# Altium PCB Power_output.PcbDoc
Units mil, origin at the board's own origin, x right, y up, seen from the top; angles counter-clockwise.
Board outline 1378.05 x 1378.81 mil, 2 copper layers (Top Layer, Bottom Layer); 46 components, 17 nets, 106 pads, 251 vias.
Unrouted connection lines stored in the file: 33.
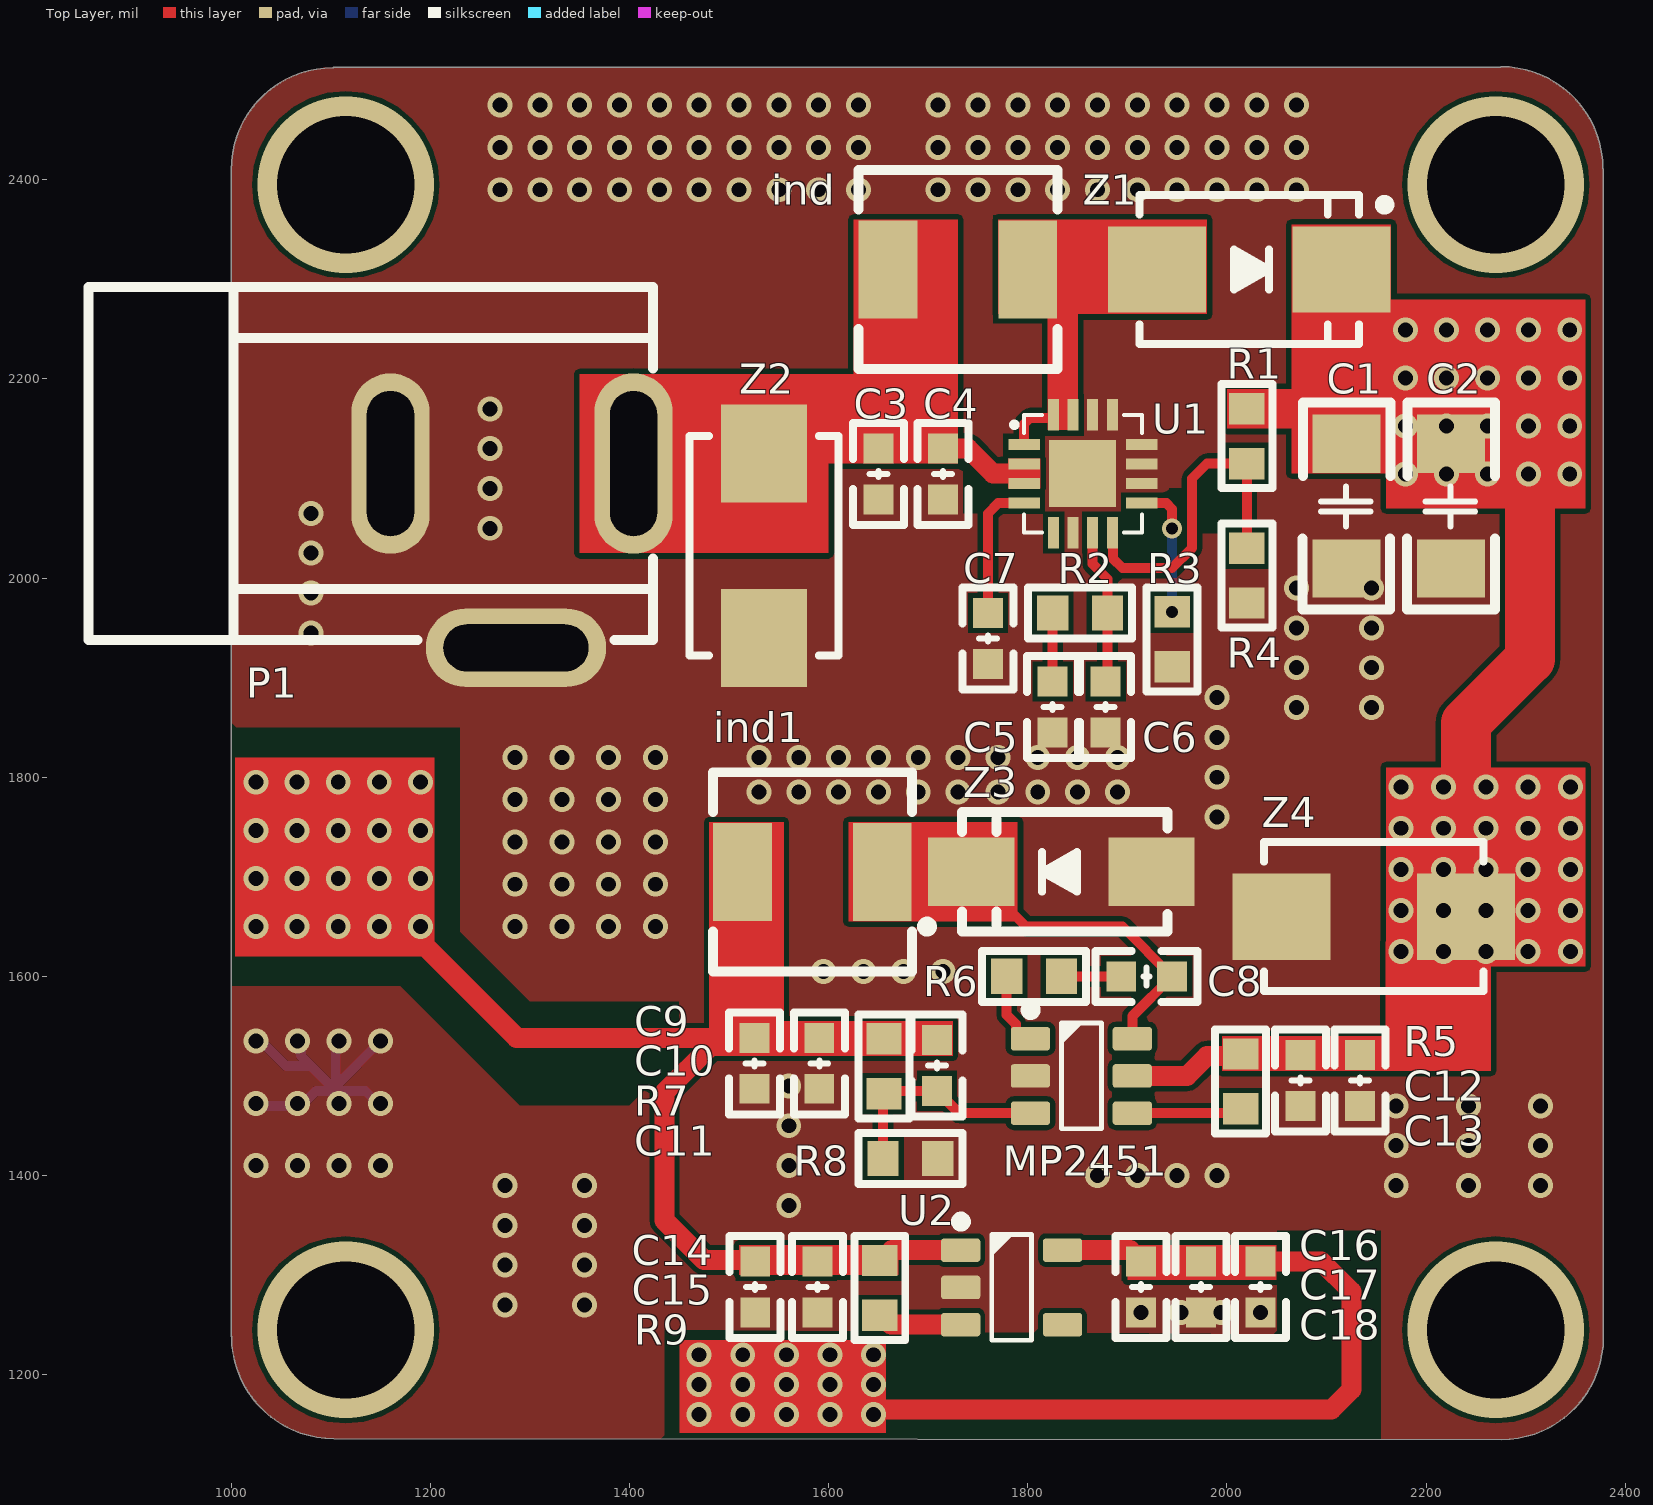
[diagram p0: Top Layer view]
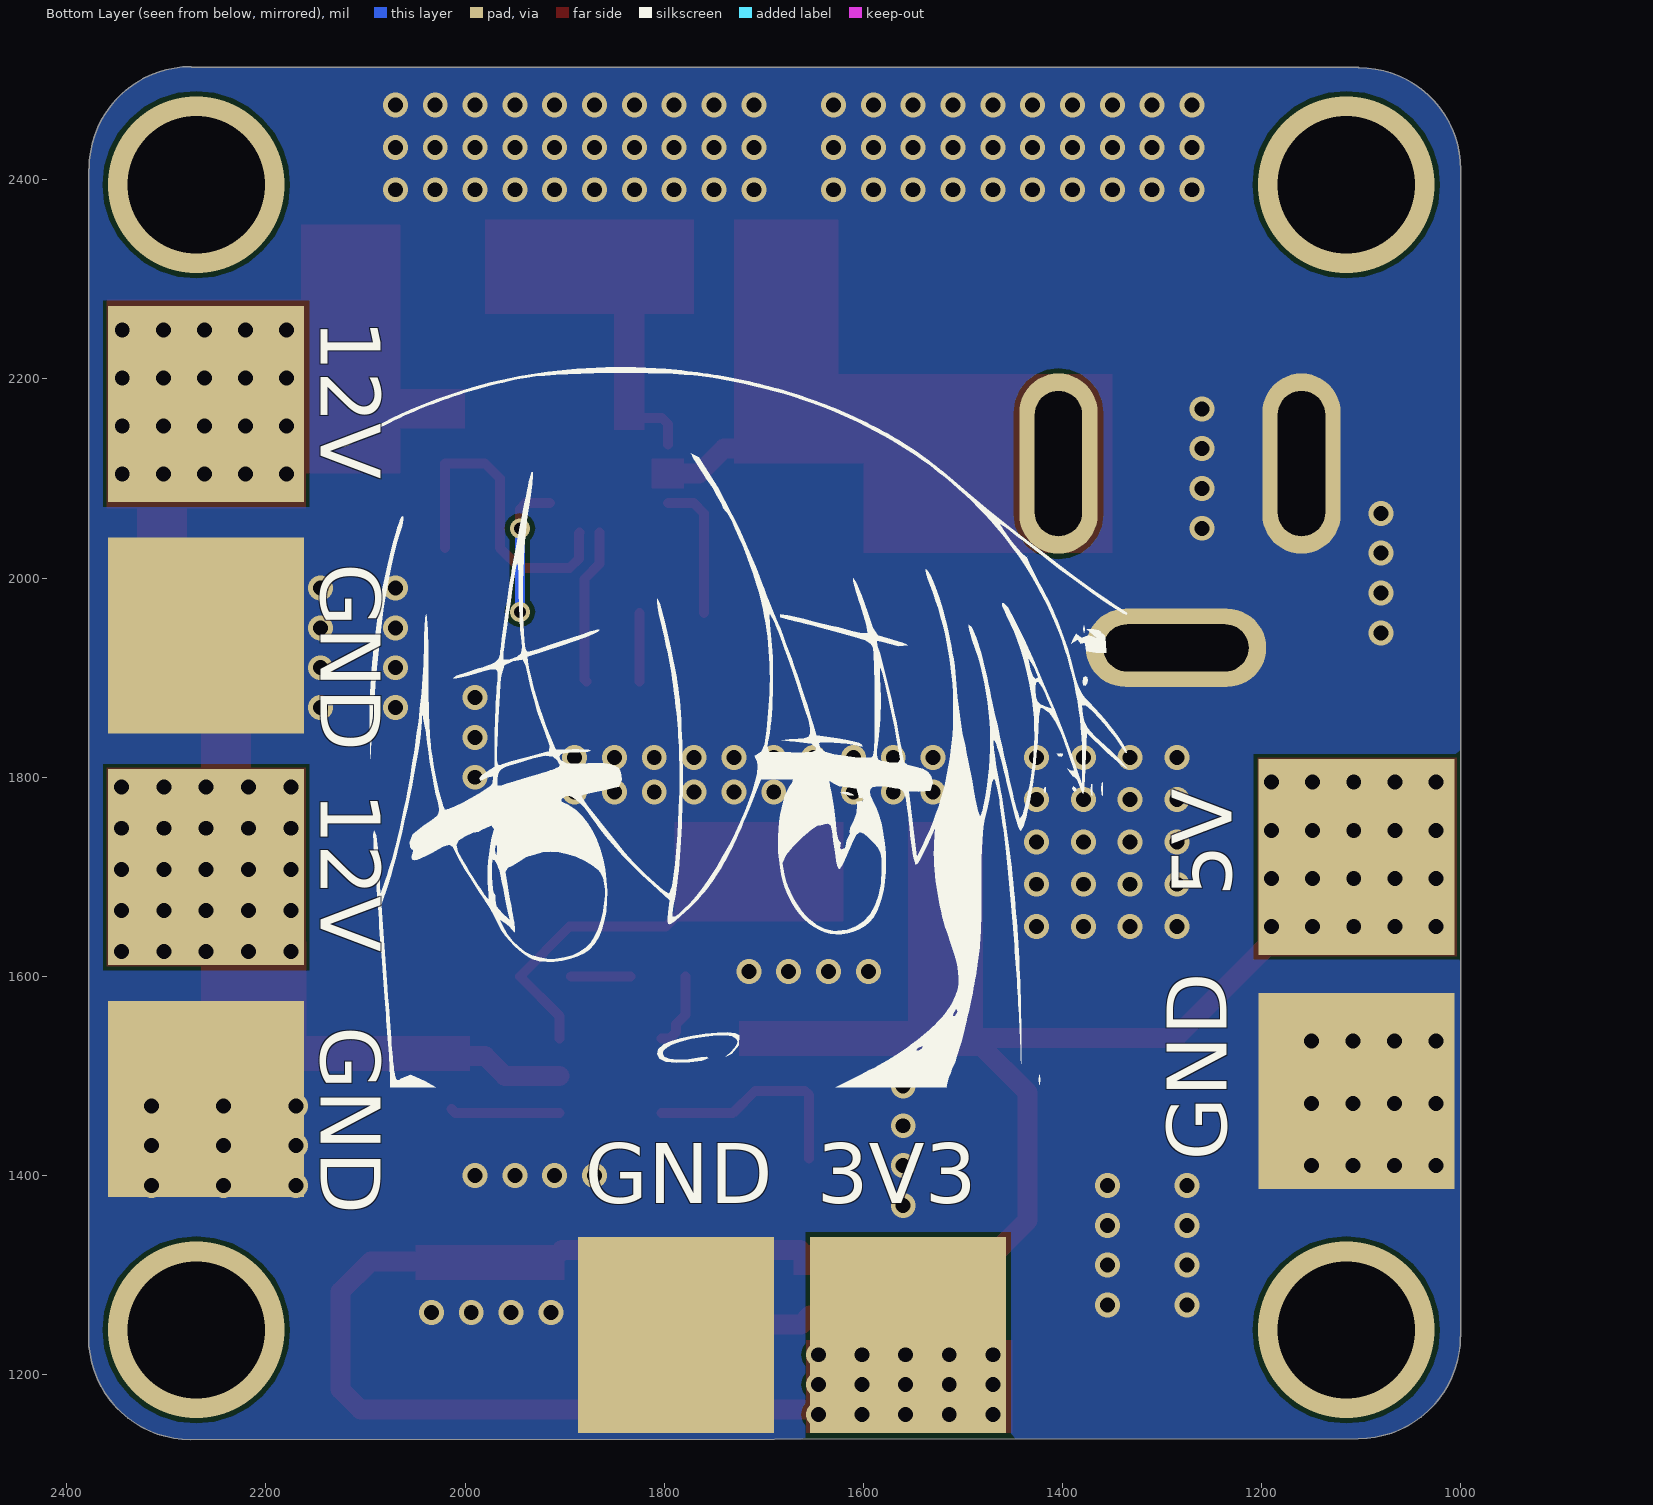
[diagram p1: Bottom Layer view, seen from below]
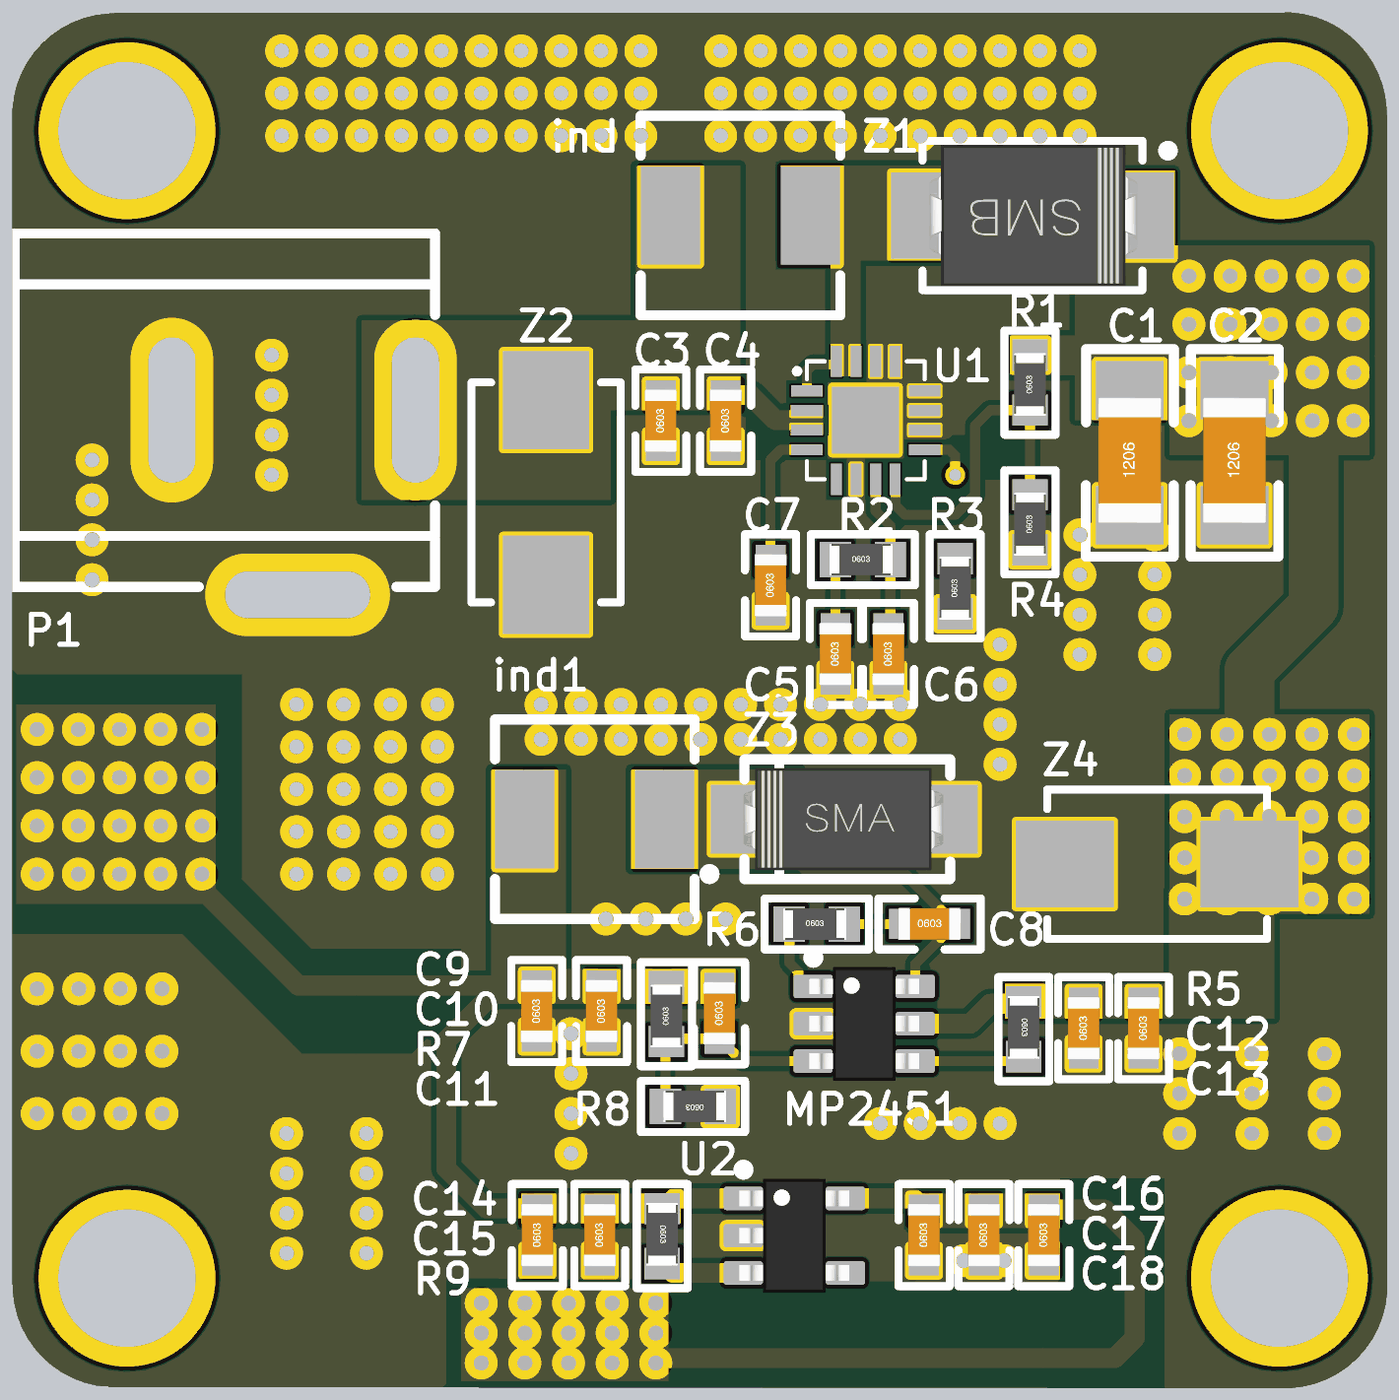
[diagram p2: 3D render of the assembled board from above, using the file's embedded part models]

## Layer stack, top to bottom
Top Solder: solder mask 0.4, Solder Resist, Dk 3.5
Top Layer: signal copper 1.4
Dielectric 1: dielectric 12.6, FR-4, Dk 4.8
Bottom Layer: signal copper 1.4
Bottom Solder: solder mask 0.4, Solder Resist, Dk 3.5

## Board outline
1102.9,1135.84 cw(c1102.9,1238.3) 1000.43,1238.3 1000,1238.3 1000,2410 1000,2410.06 cw(c1102.46,2410.06) 1102.46,2512.52 1102.95,2512.95 2275.09,2512.95 2275.09,2513.63 cw(c2275.09,2411.17) 2377.56,2411.17 2377.95,2411.17 2377.95,1237.28 2378.05,1237.28 cw(c2275.59,1237.28) 2275.59,1134.82

## Design rules (kind name [scope] priority, off if disabled: settings)
Clearance [All] p1: gap=5 ignorepadtopadclearanceinfootprint=TRUE
HoleSize [All] p1: absolutevalues=TRUE maxlimit=500 minlimit=1 maxpercent=80.000 minpercent=20.000
MinimumSolderMaskSliver [All] p1 off: minsoldermaskwidth=10
PlaneConnect [All] p1: planeconnectstyle=Direct reliefexpansion=20 reliefentries=4 reliefconductorwidth=10 reliefairgap=10
PolygonConnect [All] p1: connectstyle=Direct reliefconductorwidth=10 reliefentries=4 polygonreliefangle="90 Angle" airgapwidth=10
RoutingVias [All] p1: holewidth=12 width=20 viastyle="Through Hole" minholewidth=12 minwidth=20 maxholewidth=1000 maxwidth=1000
SilkToSilkClearance [All] p1 off: silktosilkclearance=10
SilkToSolderMaskClearance [IsPad] p1 off: minsilkscreentomaskgap=10 clearancetoexposedcopper=TRUE
SolderMaskExpansion [All] p1: expansion=4 istentingtop=FALSE
Width [All] p1: maxlimit=200 minlimit=6 preferedwidth=10
25 further rules are at their usual default settings.

## Classes and differential pairs
component class Power_output: 3V3 5V 12V C1 C2 C3 C4 C5 C6 C7 C8 C9 C10 C11 C12 C13 C14 C15 C16 C17 C18 GND ind ind1 MP2451 P1 R1 R2 R3 R4 R5 R6 R7 R8 R9 U1 U2 Z1 Z2 Z3 Z4

## Components (designator, comment, footprint, x,y, rotation, side; value= is the part's Value field where it differs from the comment)
1 "1" 1 540,1700 r0 top
3V3 "SMD-TOP" SMD-TOP 1555,1240 r180 bottom (schematic designator P3)
5V "SMD-TOP" SMD-TOP 1105,1720 r270 bottom (schematic designator P6)
12V "SMD-TOP" SMD-TOP 2260,1709.67 r180 bottom (schematic designator P8)
12V "SMD-TOP" SMD-TOP 2260,2175 r90 bottom (schematic designator P2)
C1 "?uF" CAP_1206 2120,2009.57 r90 top value=47uF/1206
C2 "?uF" CAP_1206 2225,2009.57 r90 top value=1uF/1206
C3 "?uF" CAP_0603 1650,2078.82 r90 top value=10uF/0603
C4 "?uF" CAP_0603 1715,2078.82 r90 top value=0.1uF/0603
C5 "?uF" CAP_0603 1825,1845 r90 top value=0.1uF/0603
C6 "?uF" CAP_0603 1878.19,1845 r90 top value=2nF/0603
C7 "?uF" CAP_0603 1760,1913.82 r90 top value=22nF/0603
C8 "?uF" CAP_0603 1893.82,1600 r0 top value=0.1uF/0603
C9 "?uF" CAP_0603 1525.63,1487.08 r90 top value=10uF/0603
C10 "?uF" CAP_0603 1590.63,1487.08 r90 top value=0.1uF/0603
C11 "?uF" CAP_0603 1708.82,1485 r90 top value=0.1uF/0603
C12 "?uF" CAP_0603 2073.82,1470 r90 top value=4.7uF/0603
C13 "?uF" CAP_0603 2133.82,1470 r90 top value=0.1uF/0603
C14 "?uF" CAP_0603 1526.26,1262.6 r90 top value=4.7uF/0603
C15 "?uF" CAP_0603 1588.82,1262.6 r90 top value=0.1uF/0603
C16 "?uF" CAP_0603 1913.82,1262.6 r90 top value=4.7uF/0603
C17 "?uF" CAP_0603 1973.82,1262.6 r90 top value=4.7uF/0603
C18 "?uF" CAP_0603 2033.82,1262.6 r90 top value=0.1uF/0603
GND "SMD-TOP" SMD-TOP 2260,1477 r180 bottom (schematic designator P9)
GND "SMD-TOP" SMD-TOP 1105,1485 r270 bottom (schematic designator P7)
GND "SMD-TOP" SMD-TOP 2260,1942.33 r90 bottom (schematic designator P5)
GND "SMD-TOP" SMD-TOP 1788,1240 r180 bottom (schematic designator P4)
ind "6.8uH" IND4*4*2 1659.8,2310 r0 top
ind1 "4.7uH" IND4*4*2 1653.82,1705 r180 top
MP2451 "MP2451" SOT23-6 1853.82,1500 r0 top
P1 "DC-005-5.5-2.1" DC-005 1404.08,2114.99 r0 top
R1 "?K" RES_0603 2020,2115 r90 top value=86.6K/0603
R2 "?K" RES_0603 1825,1965 r0 top value=825R/0603
R3 "?K" RES_0603 1945,1910.9 r90 top value=60.4K/0603
R4 "?K" RES_0603 2020,1975 r90 top value=10K/0603
R5 "?K" RES_0603 2013.82,1522.09 r270 top value=10K/0603
R6 "?K" RES_0603 1778.82,1600 r0 top value=10R/0603
R7 "?K" RES_0603 1655.63,1482.08 r90 top value=124K/0603
R8 "?K" RES_0603 1709.72,1417.08 r180 top value=23.7K/0603
R9 "?K" RES_0603 1651.38,1314.69 r270 top value=10K/0603
U1 "TPS55340RTER" WQFN16 1796.32,2134.29 r270 top
U2 "SPX5205M5-3.3V" SOT23-5 1783.82,1287.6 r0 top
Z1 "SS34/SMBJ" SMB 2012.48,2315 r0 top
Z2 "SMBJ-CA" "SMB( No proporcionado)" 1535,1939.96 r90 top
Z3 "SS34/SMAJ" SMA 1838.82,1705 r180 top
Z4 "SMBJ-CA" "SMB( No proporcionado)" 2054.96,1660 r0 top

## Footprints (in the part's own frame and the unit in brackets; to place one, negate y for a bottom-side part, rotate by r counter-clockwise, add the part's x,y. Pads: shape width x height; smd on the part's side, far side on the other; paste and mask are expansions set on the pad)
1 [mil]
CAP_0603 [mil] "Chip Capacitor, Body 1.6x0.8mm, 0603, IPC Medium Density"
  rect 30x30 smd: 1(0,0) 2(51.18,0)
  silkscreen extent -26,-26 77,26, body extent -6,-16 57,16, height 32
CAP_1206 [mm] "Chip Capacitor, Body 3.2x1.6mm, 1206, IPC Medium Density"
  rect 1.485x1.728 smd: 1(0,0) 2(3.186,0)
  silkscreen extent -1.05,-1.12 4.23,1.12, body extent -0.2,-0.81 3,0.81, height 1.21
DC-005 [mm]
  oval 2x4.6 hole 1.2 slot 3.7 at 90 deg mask+0.051: 1(0,0) 2(-6.2,0)
  oval 4.6x2 hole 1.2 slot 3.7 at 0 deg mask+0.051: 3(-3,-4.7)
  silkscreen extent -13.9,-4.5 0.5,4.5
IND4*4*2 [mil]
  rect 59.1x98.4 smd: 1(0,0) 2(140.2,0)
  silkscreen extent -30,-100 170,100
RES_0603 [mm]
  rect 0.8x0.9 smd: 1(0,0) 2(1.4,0)
  silkscreen extent -0.63,-0.65 2.02,0.65, body extent -0.15,-0.4 1.45,0.4, height 0.4
SMA [mm]
  rect 2.2x1.75 smd: 1(-2.173,0) 2(2.427,0)
  silkscreen extent -2.57,-1.52 3.68,1.52, body extent -2.39,-1.3 2.7,1.3, height 2.15
SMB [mm]
  rect 2.5x2.2 smd: 1(-2.096,-0.127) 2(2.604,-0.127)
  silkscreen extent -2.55,-2.03 3.83,1.77, body extent -2.37,-1.93 2.93,1.67, height 2.35
"SMB( No proporcionado)" [mm]
  rect 2.5x2.2 smd: 1(0,0) 2(4.7,0)
  silkscreen extent -0.45,-1.9 5.15,1.9, body extent -0.44,-1.97 5.14,1.97, height 1.3
SMD-TOP [mm]
  rect 5x5 smd: 1(0,0)
SOT23-5 [mm]
  rrect25% 1x0.6 smd: 1(-1.3,0.95) 2(-1.3,0) 3(-1.3,-0.95) 4(1.3,-0.95) 5(1.3,0.95)
  silkscreen extent -1.42,-1.35 0.51,1.81, body extent -1.4,-1.45 1.4,1.45, height 1.44
SOT23-6 [mm]
  round 0.5 on Mech14: 0(0,0)
  rrect25% 1x0.6 smd: 1(-1.3,0.95) 2(-1.3,0) 3(-1.3,-0.95) 4(1.3,-0.95) 5(1.3,0) 6(1.3,0.95)
  silkscreen extent -1.42,-1.35 0.51,1.81, body extent -1.4,-1.45 1.4,1.45, height 1.44
WQFN16 [mil]
  rect 11x31.5 smd mask+2: 1(0,0) 2(19.7,0) 3(39.3,0) 4(59,0) 9(59,118.2) 10(39.3,118.2) 11(19.7,118.2) 12(0,118.2)
  rect 31.5x11 smd mask+2: 5(88.6,29.6) 6(88.6,49.3) 7(88.6,68.9) 8(88.6,88.6) 13(-29.6,88.6) 14(-29.6,68.9) 15(-29.6,49.3) 16(-29.6,29.6)
  rect 67x67 smd: 17(29.33,58.68)
  silkscreen extent -30,-10 89,118

## Part data
C1 C2: library part Cap_1206, "Capacitor"
C3 C4 C5 C6 C7 C8 C9 C10 C11 C12 C13 C14 C15 C16 C17 C18: library part Cap_0603, "Capacitor"
ind ind1: library part Ind
MP2451: "降压转换器"
R1 R2 R3 R4 R5 R6 R7 R8 R9: library part Res_0603, "Resistor"
U2: "LDO IC"
Z1: library part SMBJ, "TVS", SMB=SS?
Z2 Z4: "TVS"
Z3: library part SMAJ, "TVS", SMA=D?

## Via types
v1: diameter 25, hole 15, Top Layer to Bottom Layer, 245 vias
v2: diameter 177.17, hole 137.8, Top Layer to Bottom Layer, 4 vias
v3: diameter 20, hole 12, Top Layer to Bottom Layer, 2 vias

## Nets (pads, with @x,y where several pads share a name; then routed paths per layer and width w, separated by ;. In a path a pad name is that pad's centre, name@x,y a point inside that pad or via, vN(x,y) a via of type N, cw(c..) or ccw(c..) an arc to the next point about the centre after c; other vN are vias at no path point)
3V3: 3V3.1 C16.2 C17.2 C18.2 U2.5 | length 867.3
  Top Layer w20: v1@1560,1185 1580,1165 2105,1165 2125,1185 2125,1283.52 2094.74,1313.78 C18.2 ; U2.5 1902.6,1325 C16.2
  other v1: 1470,1160 1513.75,1160 1557.5,1160 1601.25,1160 1645,1160 1470,1190 1513.75,1190 1557.5,1190 1601.25,1190 1645,1190 1470,1220 1513.75,1220 1557.5,1220 1601.25,1220 1645,1220
5V: 5V.1 C9.2 C10.2 C11.2 C14.2 C15.2 ind1.2 R7.2 R9.1 U2.1 | length 1010.1
  Top Layer w20: 1100,1725 1286.74,1538.26 1481.74,1538.26 ; 1517.5,1637.5 1517.5,1565.76 1490,1538.26 ; C9.2 1498.26,1538.26 1490,1538.26 ; C14.2 1525.04,1315 1475,1315 1435,1355 1435,1483.26 1481.74,1530 1490,1530 1490,1538.26 ; R9.1 1653.35,1314.69 1663.66,1325 U2.1
  other v1: 1025,1650 1066.25,1650 1107.5,1650 1148.75,1650 1190,1650 1025,1698.33 1066.25,1698.33 1107.5,1698.33 1148.75,1698.33 1190,1698.33 1025,1746.67 1066.25,1746.67 1107.5,1746.67 1148.75,1746.67 1190,1746.67 1025,1795 1066.25,1795 1107.5,1795 1148.75,1795 1190,1795
12V: 12V.1 C1.2 C2.2 C12.2 C13.2 MP2451.5 R1.2 R5.1 Z1.2 Z4.2 | length 2863.3
  Top Layer w10: v1(2179.29,2104.34) 2179.29,2120.71 2165,2135 2179.29,2149.29 v1(2179.29,2152.68) ; v1(2179.29,2201.01) 2205.3,2175 ; v1(2179.29,2249.34) v1@2217.36,2211.28 ; 2220.54,2175 2246.55,2175 ; v1(2220.54,2201.01) 2246.55,2175 ; v1(2220.54,2249.34) 2220.54,2214.46 2256.82,2178.18 ; 2253.64,2175 2246.55,2175 ; v1(2261.79,2104.34) 2261.79,2124.34 v1(2261.79,2152.68) 2261.79,2173.21 2260,2175 ; v1(2261.79,2201.01) v1@2260,2199.22 ; v1(2261.79,2249.34) 2260,2247.55 v1@2260,2206.3 ; v1@2299.5,2149.14 v1(2344.29,2104.34) ; v1(2303.04,2152.68) 2280.72,2175 ; v1(2303.04,2249.34) v1@2260,2206.3 ; v1(2344.29,2152.68) 2321.97,2175 2280.72,2175 ; v1(2344.29,2201.01) v1(2303.04,2201.01) 2286.01,2201.01 ; v1(2344.29,2249.34) 2320.13,2225.18 2310.18,2225.18 2286.01,2201.01 ; 2260,2175 2286.01,2201.01 ; 2260,2175 2280.72,2175 ; 2260,2175 v1@2260,2199.22 ; v1@2260,2199.22 v1@2260,2206.3
  Top Layer w20: MP2451.5 1960,1500 1980,1520 2011.73,1520 R5.1
  Top Layer w50: 2165,2135 2189.89,2135 2207.44,2117.44 v1(2220.54,2104.34) ; C2.2@2205.3,2152.68 v1(2220.54,2152.68) ; C2.2@2224.29,2124.34 2261.79,2124.34 2285,2124.34 ; 2240,1705 2240,1785 2240,1854.51 2304.29,1918.8 2304.29,2103.09 v1(2303.04,2104.34) 2303.04,2131.96 2272.06,2162.94 2261.79,2173.21
  Bottom Layer w10: v1(2179.29,2104.34) 2203.46,2128.51 2213.51,2128.51 12V.1@2237.68,2152.68 ; v1(2179.29,2152.68) v1(2220.54,2152.68) 12V.1@2237.68,2152.68 ; v1(2179.29,2201.01) 2201.79,2178.51 2226.53,2178.51 2230.04,2175 12V.1@2246.55,2175 ; v1(2179.29,2249.34) 12V.1@2217.36,2211.28 ; v1(2220.54,2104.34) 12V.1@2260,2143.8 ; v1(2220.54,2201.01) 12V.1@2246.55,2175 ; v1(2220.54,2249.34) 2220.54,2214.46 12V.1@2256.82,2178.18 ; 12V.1@2260,2152.68 12V.1@2260,2173.61 ; v1(2261.79,2104.34) v1(2261.79,2152.68) 2261.79,2171.82 12V.1@2260,2173.61 ; v1(2261.79,2201.01) 12V.1@2260,2199.22 ; v1(2261.79,2249.34) 2260,2247.55 12V.1@2260,2206.3 ; v1(2303.04,2104.34) 2303.04,2131.96 12V.1@2260,2175 ; v1(2303.04,2152.68) 12V.1@2280.72,2175 ; v1(2303.04,2249.34) 12V.1@2260,2206.3 ; v1(2344.29,2104.34) 12V.1@2273.64,2175 ; v1(2344.29,2152.68) 2321.97,2175 12V.1@2280.72,2175 ; v1(2344.29,2201.01) v1(2303.04,2201.01) 12V.1@2286.01,2201.01 ; v1(2344.29,2249.34) 2320.13,2225.18 2310.18,2225.18 12V.1@2286.01,2201.01 ; 12V.1@2237.68,2152.68 12V.1@2260,2175 ; 12V.1@2246.55,2175 12V.1@2260,2175 ; 12V.1@2260,2173.61 12V.1@2260,2175 ; 12V.1@2260,2175 12V.1@2286.01,2201.01 ; 12V.1@2260,2175 12V.1@2273.64,2175 ; 12V.1@2260,2175 12V.1@2260,2199.22 ; 12V.1@2260,2199.22 12V.1@2260,2206.3 ; 12V.1@2273.64,2175 12V.1@2280.72,2175
  other v1: 2175,1625 2217.5,1625 2260,1625 2302.5,1625 2345,1625 2175,1666.25 2217.5,1666.25 2260,1666.25 2302.5,1666.25 2345,1666.25 2175,1707.5 2217.5,1707.5 2260,1707.5 2302.5,1707.5 2345,1707.5 2175,1748.75 2217.5,1748.75 2260,1748.75 2302.5,1748.75 2345,1748.75 2175,1790 2217.5,1790 2260,1790 2302.5,1790 2345,1790
GND: C1.1 C2.1 C3.1 C4.1 C5.1 C6.1 C7.1 C9.1 C10.1 C12.1 C13.1 C14.1 C15.1 C16.1 C17.1 C18.1 GND.1 MP2451.2 P1.2 P1.3 R3.1 R4.1 R8.1 U1.6 U1.10 U1.11 U1.12 U1.13 U1.14 U1.17 U2.2 Z2.1 Z3.1 Z4.1 | length 430.4
  Bottom Layer w10: GND.1@1030,1470 1070,1470 1085,1485 GND.1@1105,1485 ; GND.1@1030,1535 1055,1510 1080,1510 GND.1@1105,1485 ; GND.1@1070,1535 1070,1520 GND.1@1105,1485 ; GND.1@1110,1470 1110,1480 GND.1@1105,1485 ; GND.1@1110,1535 1105,1530 GND.1@1105,1485 ; GND.1@1150,1470 1135,1485 GND.1@1105,1485 ; v1(1150,1535) 1105,1490 GND.1@1105,1485
  other v1: 1913.82,1262.6 1953.82,1262.6 1993.82,1262.6 2033.82,1262.6 1275,1270 1355,1270 1275,1310 1355,1310 1275,1350 1355,1350 1560,1370 1275,1390 1355,1390 2170,1390 2242.5,1390 2315,1390 1870,1400 1910,1400 1950,1400 1990,1400 1025,1410 1066.67,1410 1108.33,1410 1150,1410 1560,1410 2170,1430 2242.5,1430 2315,1430 1560,1450 2170,1470 2242.5,1470 2315,1470 1025,1472.5 1066.67,1472.5 1108.33,1472.5 1150,1472.5 1560,1490 1025,1535 1066.67,1535 1108.33,1535 1595,1605 1635,1605 1675,1605 1715,1605 1285,1650 1332.06,1650 1379.12,1650 1426.19,1650 1285,1692.5 1332.06,1692.5 1379.12,1692.5 1426.19,1692.5 1285,1735 1332.06,1735 1379.12,1735 1426.19,1735 1990,1760 1285,1777.5 1332.06,1777.5 1379.12,1777.5 1426.19,1777.5 1530,1785 1570,1785 1610,1785 1650,1785 1690,1785 1730,1785 1770,1785 1810,1785 1850,1785 1890,1785 1990,1800 1285,1820 1332.06,1820 1379.12,1820 1426.19,1820 1530,1820 1570,1820 1610,1820 1650,1820 1690,1820 1730,1820 1770,1820 1810,1820 1850,1820 1890,1820 1990,1840 2070,1870 2145,1870 1990,1880 2070,1910 2145,1910 1080,1945 2070,1950 2145,1950 1080,1985 2070,1990 2145,1990 1080,2025 1260,2050 1080,2065 1260,2090 1260,2130 1260,2170 1270,2390 1310,2390 1350,2390 1390,2390 1430,2390 1470,2390 1510,2390 1550,2390 1590,2390 1630,2390 1710,2390 1750,2390 1790,2390 1830,2390 1870,2390 1910,2390 1950,2390 1990,2390 2030,2390 2070,2390 1270,2432.5 1310,2432.5 1350,2432.5 1390,2432.5 1430,2432.5 1470,2432.5 1510,2432.5 1550,2432.5 1590,2432.5 1630,2432.5 1710,2432.5 1750,2432.5 1790,2432.5 1830,2432.5 1870,2432.5 1910,2432.5 1950,2432.5 1990,2432.5 2030,2432.5 2070,2432.5 1270,2475 1310,2475 1350,2475 1390,2475 1430,2475 1470,2475 1510,2475 1550,2475 1590,2475 1630,2475 1710,2475 1750,2475 1790,2475 1830,2475 1870,2475 1910,2475 1950,2475 1990,2475 2030,2475 2070,2475
NetC5_2: C5.2 R2.1 | length 68.8
  Top Layer w10: C5.2 R2.1
NetC6_2: C6.2 R2.2 U1.7 | length 156.5
  Top Layer w10: U1.7 1865.22,2014.03 1880.12,1999.13 R2.2 1880.12,1898.11 C6.2
NetC7_2: C7.2 U1.4 | length 140.6
  Top Layer w10: C7.2 1760,2065 1770.29,2075.29 U1.4
NetC8_1: C8.1 R6.2 | length 59.9
  Top Layer w10: R6.2 C8.1
NetC8_2: C8.2 ind1.1 MP2451.6 Z3.2 | length 329.6
  Top Layer w10: Z3.2 1752.13,1705 1781.57,1675.55 1781.57,1666.69 1798.27,1650 1895,1650 C8.2 1905,1560 MP2451.6
NetC11_1: C11.1 MP2451.3 R7.1 R8.2 | length 222.9
  Top Layer w10: R8.2 1654.61,1481.06 R7.1 1658.54,1485 C11.1 1731.22,1462.6 MP2451.3
Netind_2: ind.2 U1.1 U1.15 U1.16 Z1.1 | length 86
  Top Layer w10: U1.1 1796.32,2154.79 1802.18,2160.65 1825,2160.65 1825,2195
NetMP2451_1: MP2451.1 R6.1 | length 77.1
  Top Layer w10: R6.1 1778.82,1561.22 1787.95,1552.09 1787.95,1544.21 1794.76,1537.4 MP2451.1
NetMP2451_4: MP2451.4 R5.2 | length 110.6
  Top Layer w10: MP2451.4 2009.45,1462.6 R5.2
NetR1_1: R1.1 R4.2 U1.8 | length 334.2
  Top Layer w10: U1.8 1885.42,2045.19 1885.42,2019.58 1895,2010 1945,2010 1965,2030 1965,2100 1980,2115 R1.1 R4.2
NetR3_2: R3.2 U1.9 | length 136.3
  Top Layer w10: U1.9 1939.14,2075.29 1945,2069.43 v3(1945,2050)
  Bottom Layer w10: v3(1945,1966.02) v3(1945,2050)
NetR9_2: R9.2 U2.3 | length 85.1
  Top Layer w20: R9.2 1653.35,1259.57 1662.72,1250.2 U2.3
VIN: C3.2 C4.2 ind.1 P1.1 U1.2 U1.3 Z2.2 | length 90.4
  Top Layer w20: C4.2 1740,2130 1765,2105 1795,2105
pads on no net: MP2451.0 U1.5 U2.4
copper on no net:
  other v2: 1115,1245 2270,1245 1115,2395 2270,2395

## Polygon pours and split planes (outlines as drawn)
GND on Top Layer "GND_L01_P000" (solid, remove dead copper, pour order 0): 1102.9,1135.84 cw(c1102.9,1238.3) 1000.43,1238.3 1000,1238.3 1000,2410 1000,2410.06 cw(c1102.46,2410.06) 1102.46,2512.52 1102.95,2512.95 2275.09,2512.95 2275.09,2513.63 cw(c2275.09,2411.17) 2377.56,2411.17 2377.95,2411.17 2377.95,1237.28 2378.05,1237.28 cw(c2275.59,1237.28) 2275.59,1134.82
GND on Bottom Layer "GND_L02_P001" (solid, remove dead copper, pour order 1): 1102.9,1135.84 cw(c1102.9,1238.3) 1000.43,1238.3 1000,1238.3 1000,2410 1000,2410.06 cw(c1102.46,2410.06) 1102.46,2512.52 1102.95,2512.95 2275.09,2512.95 2275.09,2513.63 cw(c2275.09,2411.17) 2377.56,2411.17 2377.95,2411.17 2377.95,1237.28 2378.05,1237.28 cw(c2275.59,1237.28) 2275.59,1134.82

## Other copper
Top Layer:
  rectangle net 12V: 2159.49,1505 2265,1635
  rectangle net 12V: 2160,1610 2360,1810
  rectangle net 3V3: 1450,1141.59 1657.54,1235
  rectangle net VIN: 1780,2090 1812.62,2120
  rectangle net 12V: 2160,2070 2360,2280
  rectangle net 3V3: 1900,1295 2050,1330
  rectangle net 5V: 1510,1300 1670,1330
  rectangle net 5V: 1003.97,1619.89 1203.97,1819.89
  rectangle net 5V: 1480,1520 1555,1755
  rectangle net 5V: 1510,1520 1725,1555
  rectangle net NetC8_2: 1620,1655 1789.92,1755
  rectangle net 12V: 1995,1505 2265,1540
  rectangle net 12V: 2000,2150 2090,2190
  rectangle net Netind_2: 1770,2265 1980,2360
  rectangle net Netind_2: 1820,2148.7 1850.42,2360
  rectangle net 12V: 2075,2105 2255,2165
  rectangle net 12V: 2065,2105 2165,2355
  rectangle net VIN: 1625,2175 1730,2360
  rectangle net VIN: 1350,2025 1600,2205
  rectangle net VIN: 1350,2115 1730,2205
  pour cut-out: 2000,2045 1942.07,2045 1942.07,2090 2000,2090
  pour cut-out: 1735,2110 1735,2065 1750,2065 1750,2110
  pour cut-out: 1435,1245 1435,1134.82 2155,1134.82 2155,1239.89
  pour cut-out: 2050,1345 2050,1240 2155,1240 2155,1345
  pour cut-out: 1000,1850 1230,1850 1230,1645 1300,1575 1450,1575 1450,1520 1400,1470 1290,1470 1170,1590 1000,1590

## Silkscreen, mask and mechanical layers (free items; w line width, h text height)
Mechanical 1:
  lines w10: 1000,1238.3 1000,2410 ; 1000,2410.06 cw(c1102.46,2410.06) 1102.46,2512.52 ; 1000.43,1238.3 ccw(c1102.9,1238.3) 1102.9,1135.84 ; 1102.9,1135 2275.59,1134.82 ccw(c2275.59,1237.28) 2378.05,1237.28 ; 1102.95,2512.95 2275.09,2512.95 ; 2275.09,2513.63 cw(c2275.09,2411.17) 2377.56,2411.17 ; 2377.95,1237.28 2377.95,2411.17